# Altium PCB InterfaceBoard.PcbDoc
Units mil, origin at the board's own origin, x right, y up, seen from the top; angles counter-clockwise.
Board outline 6000 x 2640 mil, 2 copper layers (Top Layer, Bottom Layer); 19 components, 151 nets, 115 pads, 5 vias.
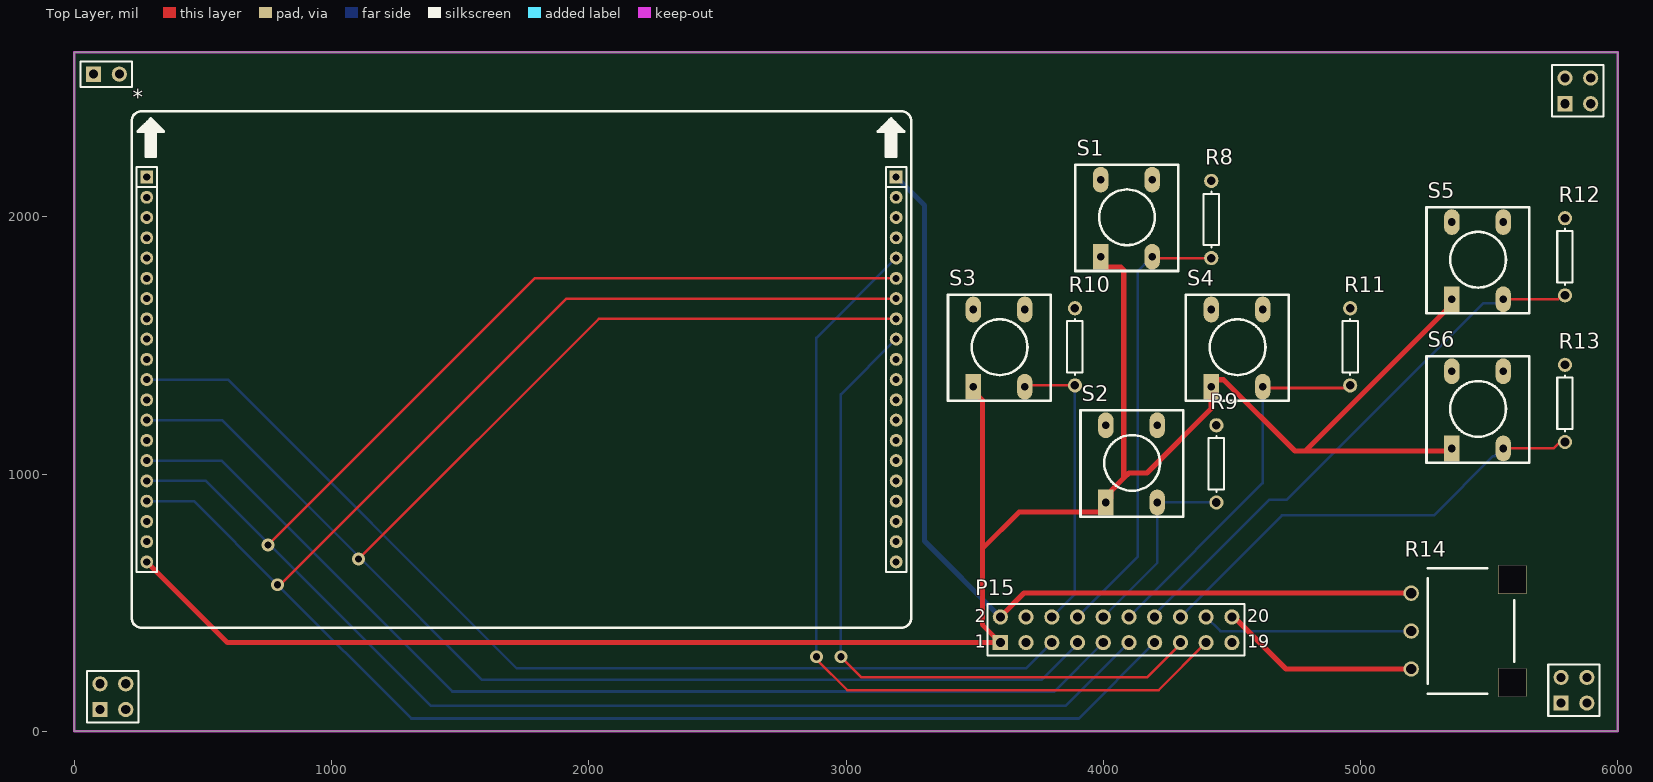
[diagram p0: Top Layer view]
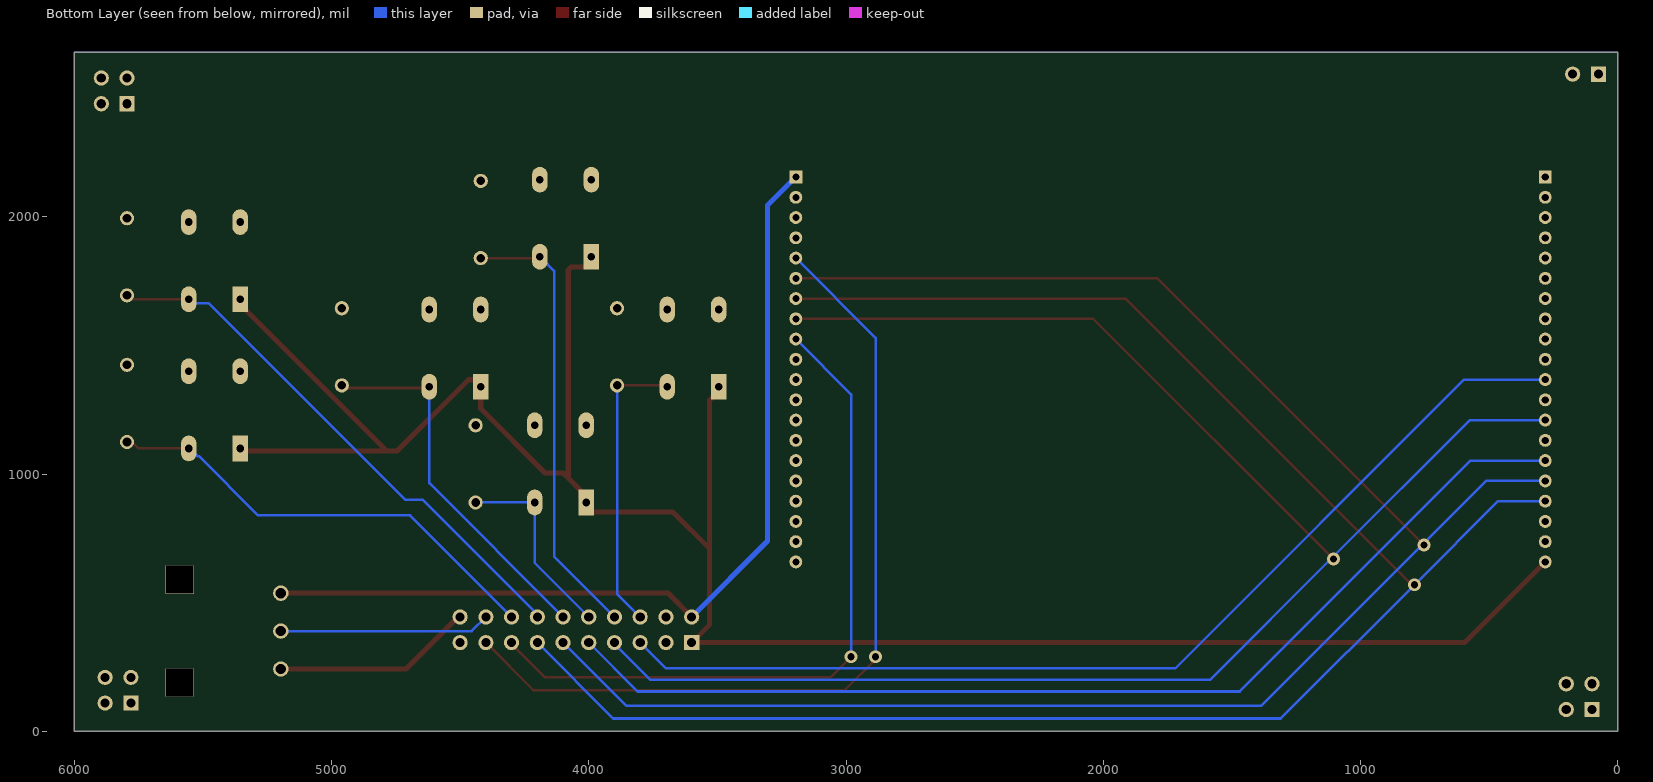
[diagram p1: Bottom Layer view, seen from below]

## Layer stack, top to bottom
Top Solder: solder mask 0.4, Solder Resist, Dk 3.5
Top Layer: signal copper 1.4
Dielectric 1: dielectric 12.6, FR-4, Dk 4.8
Bottom Layer: signal copper 1.4
Bottom Solder: solder mask 0.4, Solder Resist, Dk 3.5

## Board outline
0,0 0,2640 6000,2640 6000,0

## Design rules (kind name [scope] priority, off if disabled: settings)
Clearance [All] p1: gap=10 ignorepadtopadclearanceinfootprint=FALSE except(0: Arc-Hole Track-Hole SMDPad-Hole THPad-Hole Via-Hole Fill-Hole Poly-Hole Region-Hole Text-Hole)
PolygonConnect [All] p1: connectstyle=Relief reliefconductorwidth=10 reliefentries=4 polygonreliefangle="90 Angle" airgapwidth=10
RoutingVias [All] p1: holewidth=28 width=50 viastyle="Through Hole" minholewidth=28 minwidth=50 maxholewidth=28 maxwidth=50
SolderMaskExpansion [All] p1: expansion=4 istentingtop=FALSE
Width [InNet('AVCC1')] p1: maxlimit=20 minlimit=10 preferedwidth=20 minimp=50.000000 maximp=50.000000 favimp=50.000000
30 further rules are at their usual default settings.

## Classes and differential pairs
component class InterfaceBoard: * P15 R8 R9 R10 R11 R12 R13 R14 S1 S2 S3 S4 S5 S6

## Components (designator, comment, footprint, x,y, rotation, side; value= is the part's Value field where it differs from the comment)
* "LCD" "LCD Footprint" 1651.61,1465 r0 top locked
P15 "Header 10X2" HDR2X10 3600,345 r0 top
R8 "Res1" AXIAL-0.3 4420,1990 r90 top value=1K
R9 "Res1" AXIAL-0.3 4440,1040 r90 top value=1K
R10 "Res1" AXIAL-0.3 3890,1495 r90 top value=1K
R11 "Res1" AXIAL-0.3 4960,1495 r90 top value=1K
R12 "Res1" AXIAL-0.3 5795,1845 r90 top value=1K
R13 "Res1" AXIAL-0.3 5795,1275 r90 top value=1K
R14 "RPot_3" BigPot 5197,390 r270 top value=10K
S1 "SW-PB" "SW PB" 3990,1845 r90 top
S2 "SW-PB" "SW PB" 4010,890 r90 top
S3 "SW-PB" "SW PB" 3495,1340 r90 top
S4 "SW-PB" "SW PB" 4420,1340 r90 top
S5 "SW-PB" "SW PB" 5355,1680 r90 top
S6 "SW-PB" "SW PB" 5355,1100 r90 top
? "Comment" HDR1X2 75,2555 r0 top
? "Comment" HDR2X2 100,85 r0 top
? "Comment" HDR2X2 5795,2440 r0 top
? "Comment" HDR2X2 5780,110 r0 top

## Footprints (in the part's own frame and the unit in brackets; to place one, negate y for a bottom-side part, rotate by r counter-clockwise, add the part's x,y. Pads: shape width x height; smd on the part's side, far side on the other; paste and mask are expansions set on the pad)
AXIAL-0.3 [mm] "Axial Device, Thru-Hole; 2 Leads; 0.3 in Pin Spacing"
  round 1.4 hole 0.85: 1(-3.81,0) 2(3.81,0)
  silkscreen extent -2.77,-0.76 2.77,0.76
BigPot [mil]
  round 60 hole 40: 1(147.5,0) 2(0,0) 3(-147.5,0)
  rect 110x110 hole 106 square: ""(-200,393) ""(200,393)
  silkscreen extent -244,65 244,400
HDR1X2 [mm] "Connector; Header; 2 Position"
  rect 1.5x1.5 hole 0.9: 1(0,0)
  round 1.5 hole 0.9: 2(2.54,0)
  silkscreen extent -1.27,-1.27 3.81,1.27
HDR2X2 [mm] "Connector; Header; 2x2 Position"
  rect 1.5x1.5 hole 0.9: 1(0,0)
  round 1.5 hole 0.9: 2(0,2.54) 3(2.54,0) 4(2.54,2.54)
  silkscreen extent -1.27,-1.27 3.81,3.81
HDR2X10 [mm] "Connector; Header; 10x2 Position"
  rect 1.5x1.5 hole 0.9: 1(0,0)
  round 1.5 hole 0.9: 2(0,2.54) 3(2.54,0) 4(2.54,2.54) 5(5.08,0) 6(5.08,2.54) 7(7.62,0) 8(7.62,2.54) 9(10.16,0) 10(10.16,2.54) 11(12.7,0) 12(12.7,2.54) 13(15.24,0) 14(15.24,2.54) 15(17.78,0) 16(17.78,2.54) 17(20.32,0) 18(20.32,2.54) 19(22.86,0) 20(22.86,2.54)
  silkscreen extent -1.27,-1.27 24.13,3.81
"LCD Footprint" [mm]
  rect 1.27x1.27 hole 0.7: 1(-34.798,17.526) 21(39.202,17.526)
  round 1.27 hole 0.7: 2(-34.798,15.526) 3(-34.798,13.526) 4(-34.798,11.526) 5(-34.798,9.526) 6(-34.798,7.526) 7(-34.798,5.526) 8(-34.798,3.526) 9(-34.798,1.526) 10(-34.798,-0.474) 11(-34.798,-2.474) 12(-34.798,-4.474) 13(-34.798,-6.474) 14(-34.798,-8.474) 15(-34.798,-10.474) 16(-34.798,-12.474) 17(-34.798,-14.474) 18(-34.798,-16.474) 19(-34.798,-18.474) 20(-34.798,-20.474) 22(39.202,15.526) 23(39.202,13.526) 24(39.202,11.526) 25(39.202,9.526) 26(39.202,7.526) 27(39.202,5.526) 28(39.202,3.526) 29(39.202,1.526) 30(39.202,-0.474) 31(39.202,-2.474) 32(39.202,-4.474) 33(39.202,-6.474) 34(39.202,-8.474) 35(39.202,-10.474) 36(39.202,-12.474) 37(39.202,-14.474) 38(39.202,-16.474) 39(39.202,-18.474) 40(39.202,-20.474)
  silkscreen extent -36.3,-26.97 40.7,24.03
"SW PB" [mil]
  rect 100x60 hole 30: 1(0,0)
  oval 100x60 hole 30: 2(0,-200) 3(300,-200) 4(300,0)
  silkscreen extent -55,-302 358,98

## Part data
P15: "Header, 10-Pin, Dual row", LatestRevisionDate=17-Jul-2002, LatestRevisionNote="Re-released for DXP Platform.", Publisher="Altium Limited"
R8 R9 R10 R11 R12 R13: "Resistor", LatestRevisionDate=17-Jul-2002, LatestRevisionNote="Re-released for DXP Platform.", PackageDescription="Axial Device, Thru-Hole; 2 Leads; 0.3 in Pin Spacing", PackageReference=AXIAL-0.3, Published=8-Jun-2000, Publisher="Altium Limited"
R14: library part RPot, "Potentiometer", LatestRevisionDate=17-Jul-2002, LatestRevisionNote="Re-released for DXP Platform.", Published=8-Jun-2000, Publisher="Altium Limited", Set Position=0.5, Sim Note="Enter the Resistance value and the set point into parameter fields."
S1 S2 S3 S4 S5 S6: "DIGIKEY SW400-ND", LatestRevisionDate=17-Jul-2002, LatestRevisionNote="Re-released for DXP Platform.", Published=24-Mar-1999, Publisher="Altium Limited"

## Via types
v1: diameter 50, hole 28, Top Layer to Bottom Layer, 5 vias

## Nets (pads, with @x,y where several pads share a name; then routed paths per layer and width w, separated by ;. In a path a pad name is that pad's centre, name@x,y a point inside that pad or via, vN(x,y) a via of type N, cw(c..) or ccw(c..) an arc to the next point about the centre after c; other vN are vias at no path point)
"1:1 Atten In": 
"1:1 Enable": 
"2:1 Atten In": 
"2:1 Atten Out": 
"2:1 Enable": 
"5:1 Atten In": 
"5:1 Atten Out": 
"5:1 Enable": 
+5: *.21 P15.2 R14.3 | length 3513.1
  Top Layer w20: P15.2 3692.5,537.5 R14.3
  Bottom Layer w20: *.21 3305,2045 3305,740 P15.2
-5: P15.20 R14.1 | length 780.9
  Top Layer w20: P15.20 4508.03,445 4710.53,242.5 R14.1
ADC_Vref+: 
ADC_Vref-: 
"Atten Out": 
AVCC1: *.20 P15.1 S1.1 S2.1 S3.1 S4.1 S5.1 S6.1 | length 8531.8
  Top Layer w20: *.20 595.55,345 P15.1 3530,415 3530,710 ; S3.1 3495,1320 3515,1300 3518.28,1300 3530,1288.28 3530,710 ; S1.1 3990,1825 4010,1805 4068.28,1805 4080,1793.28 4080,985 ; S6.1@5345,1100 5335,1090 4785,1090 ; S5.1 5355,1660 4785,1090 ; 3530,710 3673.36,853.36 3990,853.36 4010,873.36 S2.1 4030,910 4030,935 4080,985 ; 4080,985 4100,1005 4170,1005 4420,1255 4420,1349 4438,1367 4468,1367 4745,1090 4785,1090
AVSS1: *.2 *.3 *.4 *.5 *.6 *.7 *.8 *.9 *.10 *.19 *.22 *.31 *.32 *.33 *.34 *.35 *.36 *.37 *.38 *.39 P15.19 R8.2 R9.2 R10.2 R11.2 R12.2 R13.2
D1: 
D2: 
DCOR: 
GAIN0: 
GAIN1: 
GAIN2: 
GAIN3: 
GAIN4: 
HorzZoomDn: P15.12 R11.1 S4.2 | length 1487.4
  Top Layer w10: S4.2@4620.47,1335 4937.79,1335 4939.16,1336.37 4959.1,1336.37 R11.1@4960.47,1335
  Bottom Layer w10: P15.12 4620,965 S4.2@4620,1375.92
HorzZoomUp: P15.6 R10.1 S3.2 | length 1134.4
  Top Layer w10: S3.2 3700,1345 R10.1
  Bottom Layer w10: P15.6 3890,535 R10.1
IN+: 
IN-: 
LATCH: 
LCD_CS: *.11 P15.5 | length 4033.8
  Top Layer w10: *.11@272.6,1367.6 *.11
  Bottom Layer w10: *.11 597.4,1367.6 1720,245 3700,245 P15.5
LCD_RS: *.15 P15.9 | length 4173.9
  Top Layer w10: P15.9@3995,345 P15.9
  Bottom Layer w10: *.15 572.36,1052.64 1470,155 3810,155 P15.9
LCD_RST: 
LCD_SCK: *.13 *.28 P15.7 | length 6595.7
  Top Layer w10: *.13@281.61,1201.61 *.13 ; v1(1105,670) 2038.82,1603.82 *.28 ; P15.7@3892.5,352.5 P15.7
  Bottom Layer w10: *.13 574.88,1210.12 1110,675 1585,200 3760,200 3900,340 P15.7
LCD_SD0: *.16 *.26 P15.11 | length 7157.7
  Top Layer w10: v1(753.43,725) 1789.73,1761.3 *.26 ; P15.11@4100,340 P15.11
  Bottom Layer w10: *.16 511.1,973.9 756.72,728.28 1385,100 3855,100 P15.11
LCD_SDI: *.17 *.27 P15.13 | length 7261.5
  Top Layer w10: v1(790,570) 800,570 1912.56,1682.56 *.27 ; P15.13@4200,340 P15.13
  Bottom Layer w10: *.17 464.84,895.16 v1(790,570) 1310,50 3905,50 P15.13
LCD_SDO: 
LOAD+: 
LOAD-: 
NC: 
NetU11_1: 
OffsetLevel: P15.18 R14.2 | length 831.9
  Top Layer w10: P15.18 P15.18@4405,445 ; R14.2@5192,395 R14.2
  Bottom Layer w10: P15.18 4455,390 R14.2
Oscilloscope_In: 
OUT+: 
OUT-: 
P1.0: 
P1.1: 
P1.2: 
P1.3: 
P1.4: 
P1.5: 
P1.6: 
P1.7: 
P2.0: 
P2.1: 
P2.2: 
P2.3: 
P2.4: 
P2.5: 
P2.6: 
P2.7: 
P3.0: 
P3.1: 
P3.2: 
P3.3: 
P3.4: 
P3.5: 
P3.6: 
P3.7: 
P4.0: 
P4.1: 
P4.2: 
P4.3: 
P4.4: 
P4.5: 
P4.6: 
P4.7: 
P5.0: 
P5.1: 
P5.2: 
P5.3: 
P5.4: 
P5.5: 
P6.0: 
P6.1: 
P6.2: 
P6.3: 
P6.4: 
P6.5: 
P6.6: 
P6.7: 
P7.0: 
P7.1: 
P7.2: 
P7.3: 
P7.4: 
P7.5: 
P7.6: 
P7.7: 
P8.0: 
P8.1: 
P8.2: 
P8.3: 
P8.4: 
P8.5: 
P8.6: 
P8.7: 
P9.0: 
P9.1: 
P9.2: 
P9.3: 
P9.4: 
P9.5: 
P9.6: 
P9.7: 
P10.5: 
PD: 
PJ.0: 
PJ.1: 
PJ.2: 
PJ.3: 
PJ.4: 
PJ.5: 
RST_NMI_N: 
S1: 
S2: 
SEL1: 
SEL2: 
SWCLKTCK: 
SWDIOTMS: 
TP_CS: *.29 P15.15 | length 2746.1
  Top Layer w10: v1(2980,290) 3060,210 4170,210 4300,340 P15.15 P15.15@4310,345
  Bottom Layer w10: v1(2980,290) 2980,1310.08 *.29
TP_IRQ: *.25 P15.17 | length 3319.8
  Top Layer w10: v1@2885,280 3005,160 4215,160 P15.17
  Bottom Layer w10: v1(2885,290) 2885,1530.04 *.25
TrigDn: P15.16 R13.1 S6.2 | length 1770.5
  Top Layer w10: S6.2@5545,1100 5749.81,1100 5774.81,1125 R13.1@5785,1125
  Bottom Layer w10: P15.16 4695,840 5285,840 5515.43,1070.43 5521.9,1070.43 5545,1093.53 S6.2@5545,1100
TrigUp: P15.14 R12.1 S5.2 | length 2118.6
  Top Layer w10: S5.2 5767.79,1680 5782.79,1695 R12.1
  Bottom Layer w10: P15.14 4200,455 4645,900 4713.23,900 5478.23,1665 5540,1665 S5.2
VCORE: 
VDD1: 
VDD2: 
VertZoomDn: P15.10 R9.1 S2.2 | length 762
  Bottom Layer w10: P15.10 4210,655 S2.2 R9.1
VertZoomUp: P15.8 R8.1 S1.2 | length 1756
  Top Layer w10: S1.2 4195,1840 R8.1
  Bottom Layer w10: P15.8 4135,680 4135,1790 4160.43,1815.43 4166.9,1815.43 4190,1838.53 S1.2
VFB: 
VGA_Gain0: 
VGA_in+: 
VGA_in-: 
VGA_Latch: 
VGA_Out+: 
VGA_Out-: 
VIN: 
Vmin: 
Vout+: 
Vout-: 
Vpos: 
VREF: 
VSW: 
pads on no net: *.1 *.12 *.14 *.18 *.23 *.24 *.30 *.40 ?.1 ?.2 ?.3 ?.4 P15.3 P15.4 R14. S1.3 S1.4 S2.3 S2.4 S3.3 S3.4 S4.3 S4.4 S5.3 S5.4 S6.3 S6.4

## Polygon pours and split planes (outlines as drawn)
AVSS1 on Top Layer "NONET_L01_P002" (solid, shelved, pour order 2): 0,0 0,2640 6000,2640 6000,0
AVSS1 on Bottom Layer "NONET_L02_P003" (solid, shelved, pour order 3): 0,2640 6000,2640 6000,0 0,0

## Keep-outs
Top Layer:
  the board outline again, w10

## Text inside footprints (layer, text, board x,y; h text height)
P15: Top Overlay "20" at 4560,425 h50; Top Overlay "19" at 4560,325 h50; Top Overlay "1" at 3500,325 h50; Top Overlay "2" at 3500,425 h50